# Altium PCB board.PcbDoc (part 1 of 3)
Units mil, origin at the board's own origin, x right, y up, seen from the top; angles counter-clockwise.
Board outline 2246 x 2100 mil, 2 copper layers (Top Layer, Bottom Layer); 47 components, 39 nets, 150 pads, 7 vias.
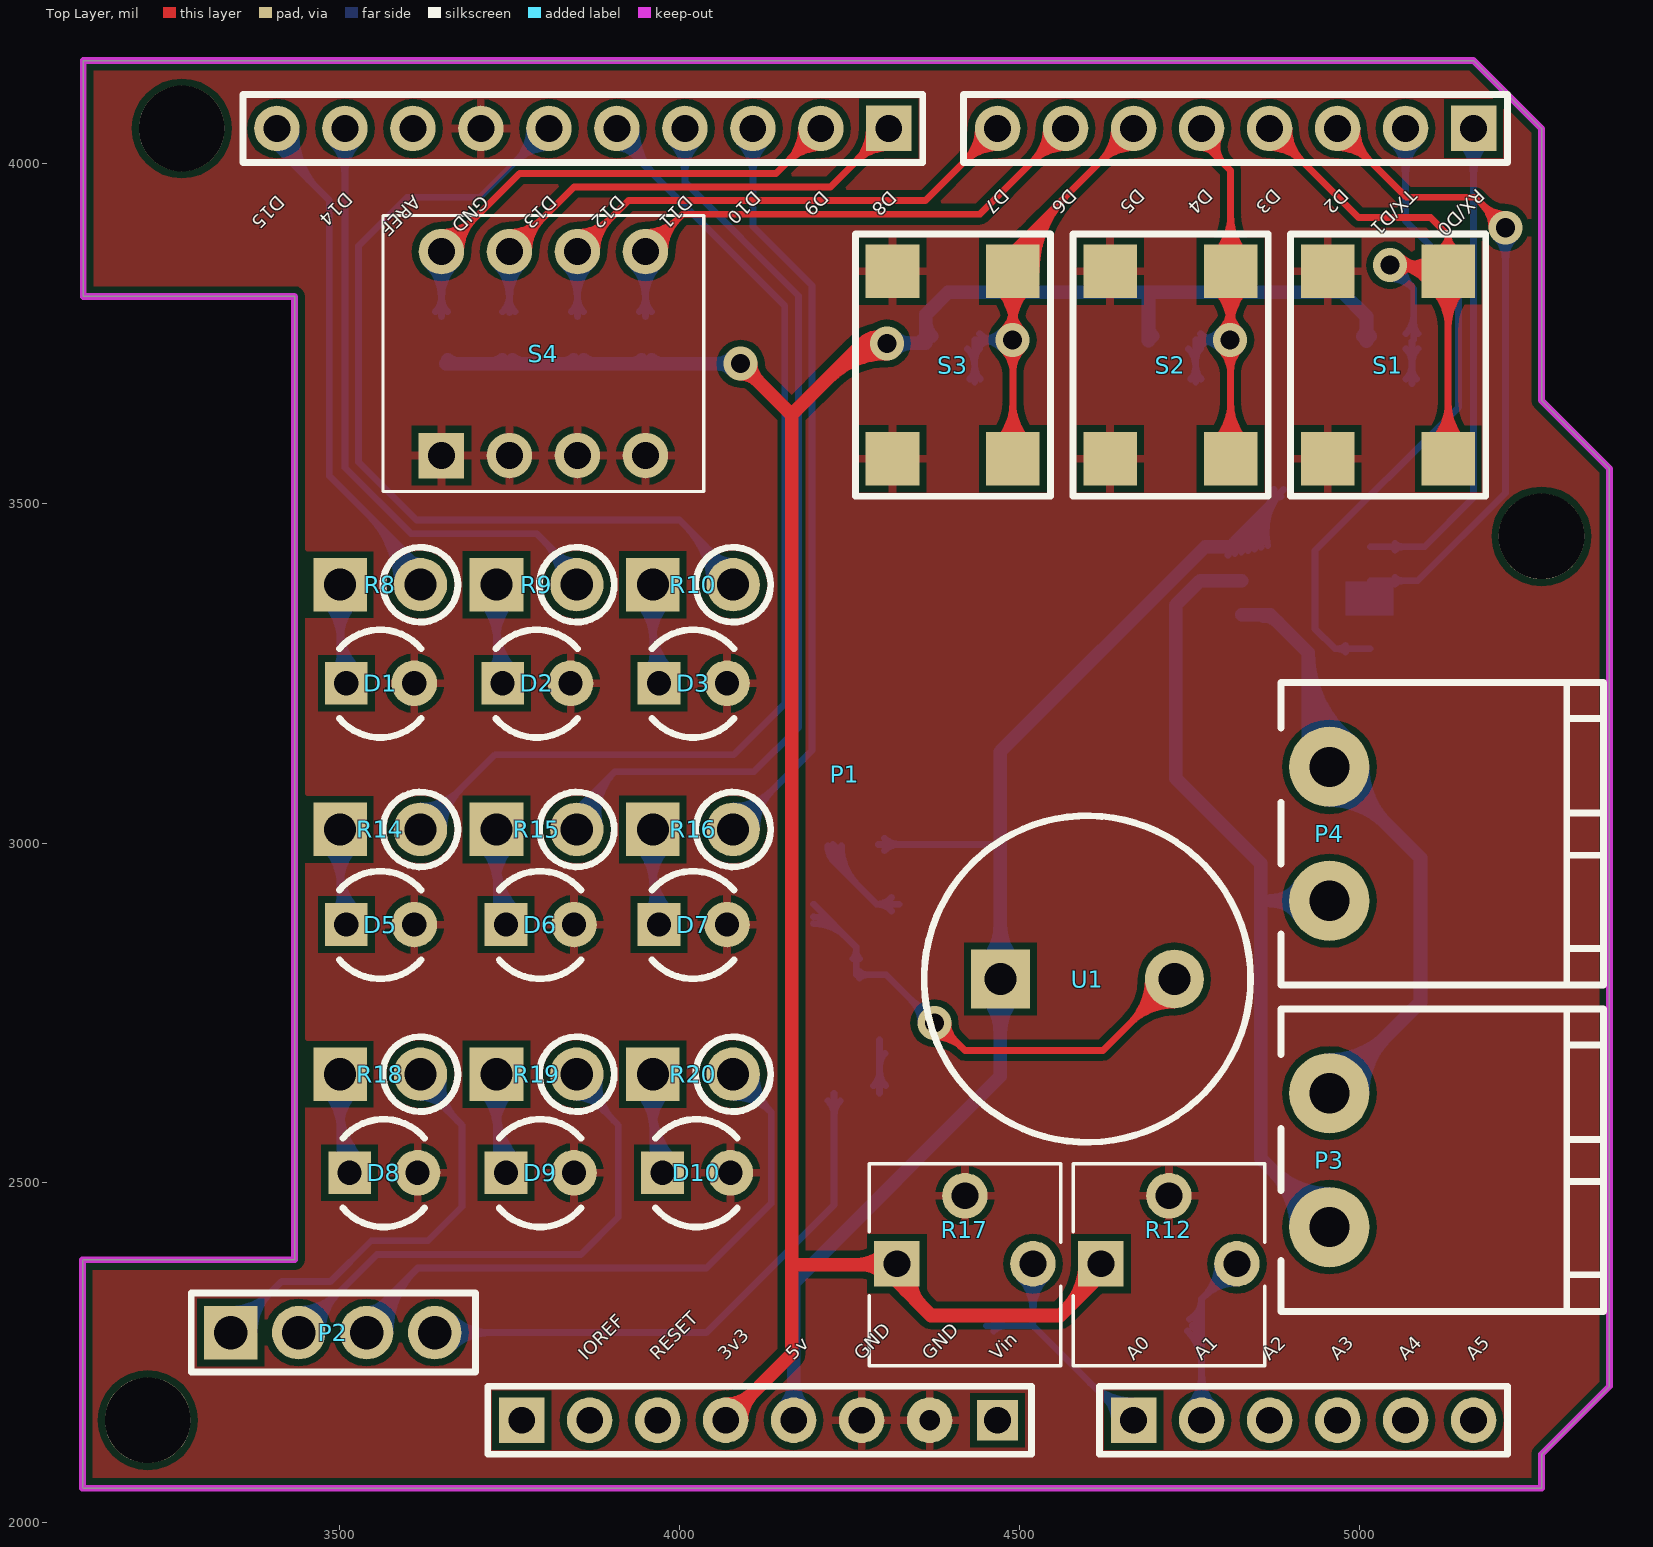
[diagram p0: Top Layer view]
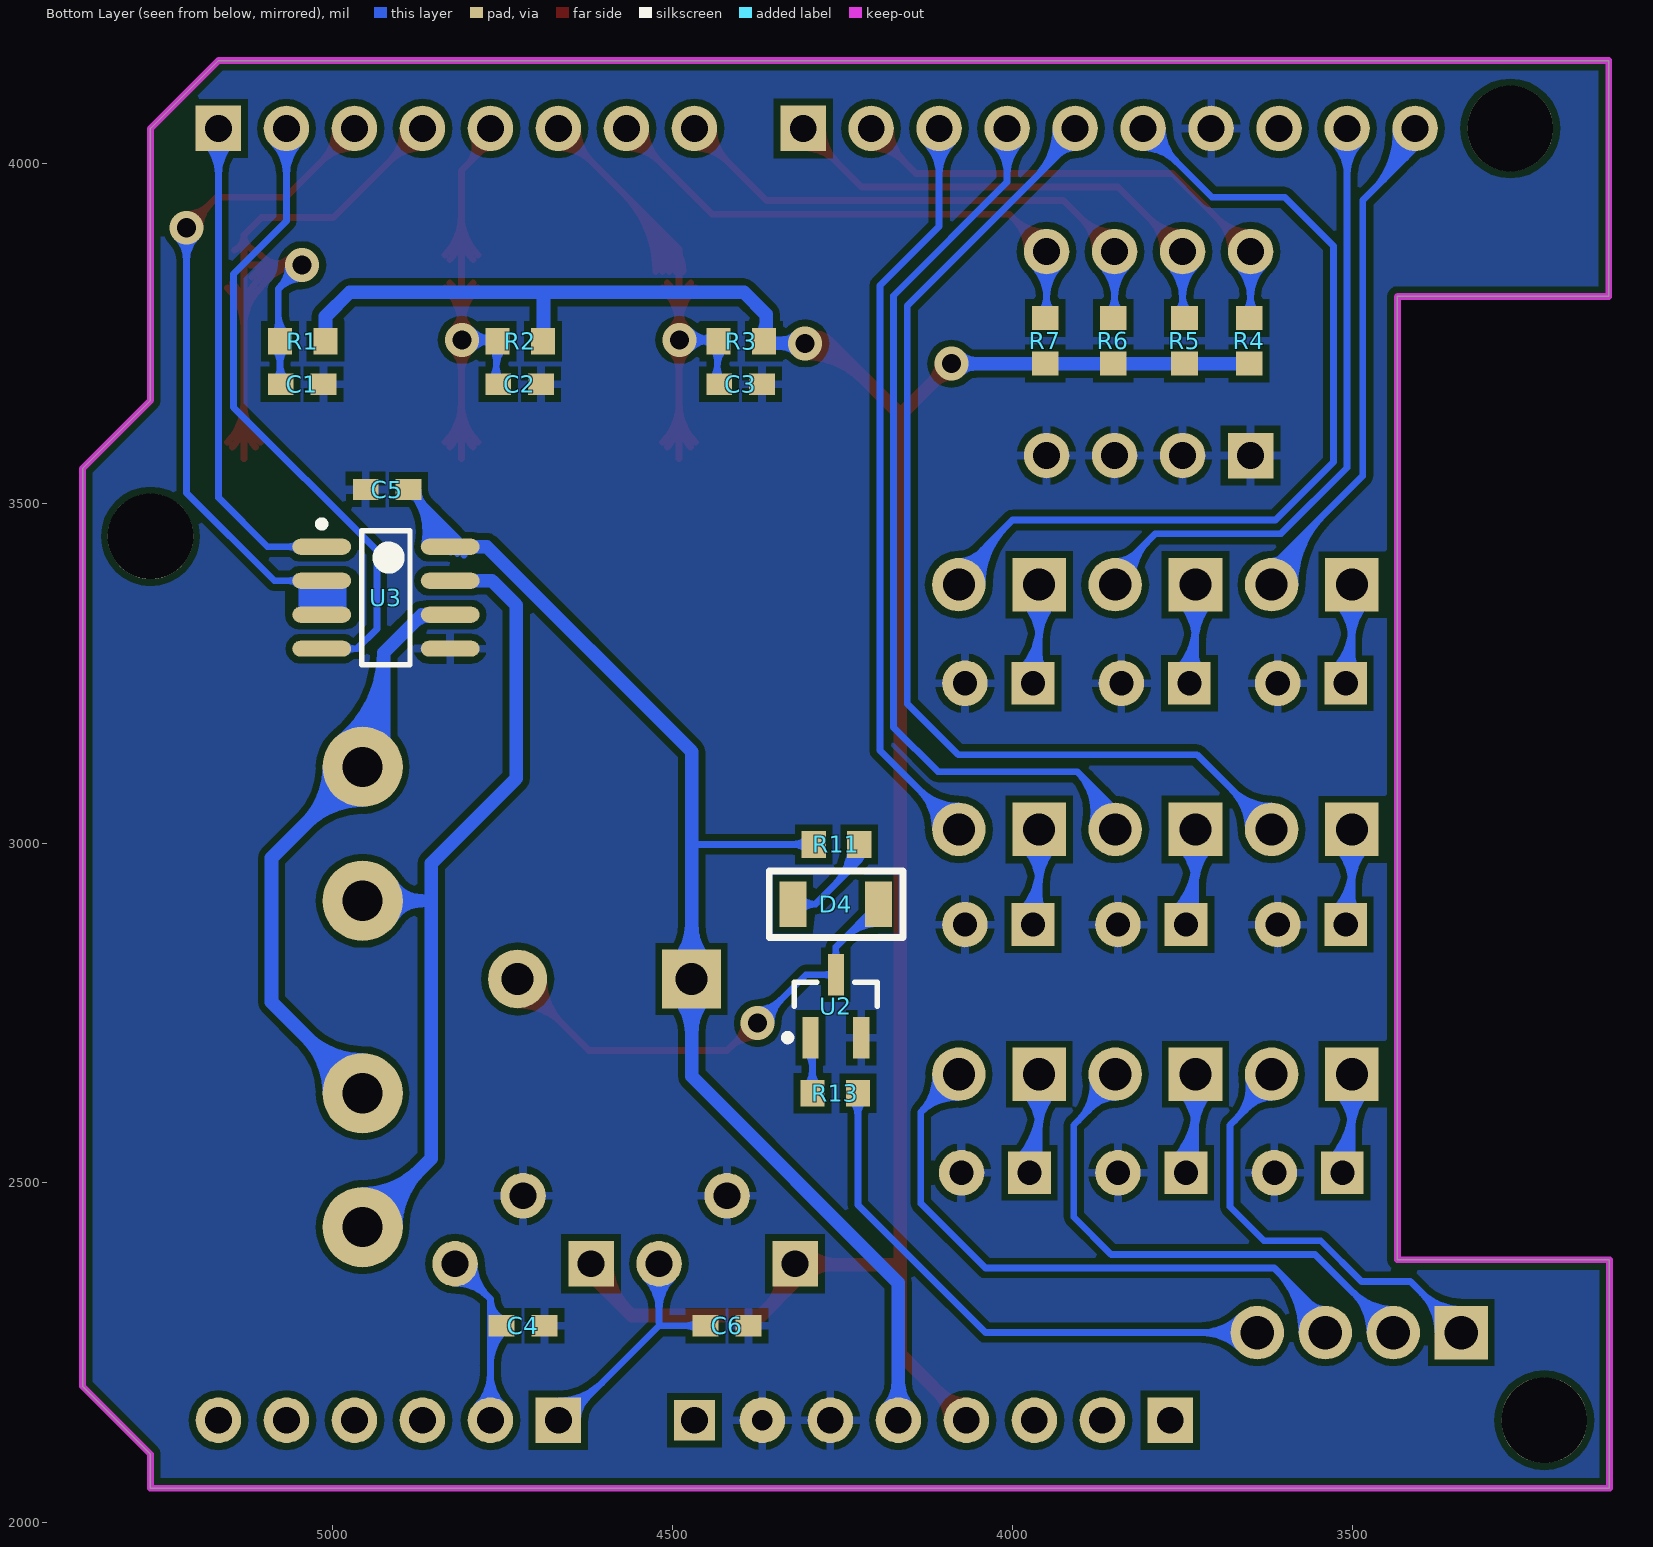
[diagram p1: Bottom Layer view, seen from below]

## Layer stack, top to bottom
Top Layer: signal copper 1.4
Dielectric: dielectric 12.6, FR-4, Dk 4.8
Bottom Layer: signal copper 1.4

## Board outline
3122,2051 3122,2387 3434,2387 3434,3804 3123,3804 3123,4151 5168,4151 5268,4051 5268,3651 5368,3551 5368,2201 5268,2101 5268,2051

## Design rules (kind name [scope] priority, off if disabled: settings)
Clearance Clearance_Board_Keepout [OnLayer('KeepOutLayer')] p1: gap=20
Clearance Screw [InPoly vs HasPad('Free-')] p2: gap=50
Clearance PowerNet [InNetClass('PowerNets')] p3: gap=20
Clearance Fill [IsFill OR InPoly vs IsFill] p4: gap=20
Clearance Polygon [InPoly vs InPoly] p5: gap=10
Clearance Clearance_Via_Pad [(IsVia) vs (IsPad)] p6: gap=15
Clearance Clearance_Via_Via [(IsVia) vs (IsVia)] p7: gap=15
Clearance Clearance_DiffPairRouting [(IsTrack AND InDifferentialPairClass('All Differential Pairs')) vs (IsTrack AND InDifferentialPairClass('All Differential Pairs'))] p8: gap=8
Clearance Minimum_pad_component_clearcance [(InPadClass('All Pads') AND InComponentClass('All Components')) vs (InPadClass('All Pads') AND InComponentClass('All Components'))] p9: gap=7
Clearance Clearance_wara_Default [All] p10: gap=10
DiffPairsRouting [All] p1: maxlimit=10 minlimit=8 mostfreqgap=8 maxuncoupledlength=500
HoleSize [All] p1: absolutevalues=TRUE maxlimit=260 minlimit=20 maxpercent=80.000 minpercent=20.000
MinimumAnnularRing [All] p1: minimumring=8
PolygonConnect [All] p1: connectstyle=Relief reliefconductorwidth=12 reliefentries=4 polygonreliefangle="90 Angle"
RoutingPriority RoutingPriority_Power [InNetClass('Power')] p1: routingpriority=50
RoutingPriority [All] p2: routingpriority=0
RoutingVias [All] p1: holewidth=20 width=36 viastyle="Through Hole" minholewidth=20 minwidth=36 maxholewidth=28 maxwidth=50
SilkscreenOverComponentPads [All] p1: minsilkscreentomaskgap=10
SolderMaskExpansion ViaSolderMaskExpansion [IsVia] p1: expansion=-100
SolderMaskExpansion [All] p2: expansion=5
Width Width_Trackends [All] p1: maxlimit=200 minlimit=5 preferedwidth=7.87 checkconnectedcopper=TRUE
Width Width_Power [InNetClass('Power')] p2: maxlimit=200 minlimit=50 preferedwidth=50
Width Width_All [All] p3: maxlimit=200 minlimit=8 preferedwidth=10
24 further rules are at their usual default settings.

## Components (designator, comment, footprint, x,y, rotation, side; value= is the part's Value field where it differs from the comment)
C1 "0.1uF" CAP0603 5045,3675 r0 bottom
C2 "0.1uF" CAP0603 4725,3675 r0 bottom
C3 "0.1uF" CAP0603 4400,3675 r0 bottom
C4 "1uF" CAP0603 4720,2290 r0 bottom
C5 "0.1uF" CAP0603 4920,3520 r180 bottom
C6 "1uF" CAP0603 4420,2290 r0 bottom
D1 "RED" LED_RED_3MM 3560,3235 r0 top
D2 "YELLOW" LED_YELLOW_3MM 3790,3235 r0 top
D3 "GREEN" LED_GREEN_3MM 4020,3235 r0 top
D4 "PMLL4148L" SOD_08 4260,2910 r0 bottom
D5 "RED" LED_RED_3MM 3560,2880 r0 top
D6 "YELLOW" LED_YELLOW_3MM 3795,2880 r0 top
D7 "GREEN" LED_GREEN_3MM 4020,2880 r0 top
D8 "RED" LED_RED_3MM 3565,2515 r0 top
D9 "YELLOW" LED_YELLOW_3MM 3795,2515 r0 top
D10 "GREEN" LED_GREEN_3MM 4025,2515 r0 top
P1 "NUCLEO F401RE Arduino Shield" NECLEO_F401RE_SHIELD 3740,3320 r0 top locked
P2 "Header 4" PIN_STRAIGHT_1X4 3640,2280 r0 top
P3 "RS485" 5EHDRC_1X2 5100,2540 r90 top
P4 "RS485" 5EHDRC_1X2 5100,3020 r90 top
R1 "10k" RES0603 5045,3740 r0 bottom
R2 "10k" RES0603 4725,3740 r0 bottom
R3 "10k" RES0603 4400,3740 r0 bottom
R4 "10k" RES0603 3650,3740 r90 bottom
R5 "10k" RES0603 3745,3740 r90 bottom
R6 "10k" RES0603 3850,3740 r90 bottom
R7 "10k" RES0603 3950,3740 r90 bottom
R8 "100" RES_VERTICAL_1/4W 3560,3380 r0 top
R9 "100" RES_VERTICAL_1/4W 3790,3380 r0 top
R10 "100" RES_VERTICAL_1/4W 4020,3380 r0 top
R11 "1k" RES0603 4260,3000 r0 bottom
R12 "1K" POTEN_3362P 4720,2380 r0 top
R13 "1k" RES0603 4260,2630 r180 bottom
R14 "100" RES_VERTICAL_1/4W 3560,3020 r0 top
R15 "100" RES_VERTICAL_1/4W 3790,3020 r0 top
R16 "100" RES_VERTICAL_1/4W 4020,3020 r0 top
R17 "1K" POTEN_3362P 4420,2380 r0 top
R18 "100" RES_VERTICAL_1/4W 3560,2660 r0 top
R19 "100" RES_VERTICAL_1/4W 3790,2660 r0 top
R20 "100" RES_VERTICAL_1/4W 4020,2660 r0 top
S1 "TACT_SW" TACT_SW_6X6 5040,3700 r90 top
S2 "TACT_SW" TACT_SW_6X6 4720,3700 r90 top
S3 "TACT_SW" TACT_SW_6X6 4400,3700 r90 top
S4 "SW DIP-4" DIP_SW_4 3800,3720 r0 top
U1 "Buzzer" MAGNETIC_BUZZER 4600,2800 r0 top
U2 "MMBT4401LT1G" SOT-23A 4260,2760 r90 bottom
U3 "SN75176BDR" SOIC8 4920,3380 r180 bottom

## Footprints (in the part's own frame and the unit in brackets; to place one, negate y for a bottom-side part, rotate by r counter-clockwise, add the part's x,y. Pads: shape width x height; smd on the part's side, far side on the other; paste and mask are expansions set on the pad)
5EHDRC_1X2 [mm]
  round 3 hole 1.5: 1(-2.666,3.658) 2(2.337,3.658)
  silkscreen extent -5.82,-6.58 5.49,5.46, body extent -5.64,-6.45 5.31,5.31, height 8.51
CAP0603 [mm]
  rect 0.965x0.8 smd: 1(-0.8,0) 2(0.8,0)
  body extent -0.84,-0.43 0.81,0.43, height 0.55
DIP_SW_4 [mm] "Dip Switch 4 Positions, SPST,Silver Plated Contact,  Through Hole"
  rect 1.7x1.7 hole 1: 1(-3.81,-3.81)
  round 1.7 hole 1: 2(-1.27,-3.81) 3(1.27,-3.81) 4(3.81,-3.81) 5(3.81,3.81) 6(1.27,3.81) 7(-1.27,3.81) 8(-3.81,3.81)
  silkscreen extent -5.99,-5.16 5.99,5.16, body extent -5.84,-5 5.84,5, height 4.5
LED_GREEN_3MM [mm]
  rect 1.6x1.6 hole 0.9: 1(-1.27,0)
  round 1.7 hole 0.9: 2(1.27,0)
  silkscreen extent -1.53,-2.02 1.53,2, body extent -1.87,-1.91 1.97,1.93, height 5.32
LED_RED_3MM [mm]
  rect 1.6x1.6 hole 0.9: 1(-1.27,0)
  round 1.7 hole 0.9: 2(1.27,0)
  silkscreen extent -1.53,-2.02 1.53,2, body extent -1.87,-1.91 1.97,1.93, height 5.32
LED_YELLOW_3MM [mm]
  rect 1.6x1.6 hole 0.9: 1(-1.27,0)
  round 1.7 hole 0.9: 2(1.27,0)
  silkscreen extent -1.53,-2.02 1.53,2, body extent -1.87,-1.91 1.97,1.93, height 5.32
MAGNETIC_BUZZER [mm]
  rect 2.2x2.2 hole 1.2: 1(-3.25,0)
  round 2.2 hole 1.2: 2(3.25,0)
  silkscreen extent -6.1,-6.1 6.1,6.1, body extent -5.99,-6.05 5.96,5.93, height 8.6
NECLEO_F401RE_SHIELD [mm]
  round 3.2 hole 3.2: 0(-13.259,-29.693) 0(-11.989,18.567) 0(38.811,3.327)
  rect 1.7x1.7 hole 1: 1(0.711,-29.693) 9(23.571,-29.693) 15(36.271,18.567) 23(14.427,18.567)
  round 1.7 hole 1: 2(3.251,-29.693) 3(5.791,-29.693) 4(8.331,-29.693) 5(10.871,-29.693) 6(13.411,-29.693) 10(26.111,-29.693) 11(28.651,-29.693) 12(31.191,-29.693) 13(33.731,-29.693) 14(36.271,-29.693) 16(33.731,18.567) 17(31.191,18.567) 18(28.651,18.567) 19(26.111,18.567) 20(23.571,18.567) 21(21.031,18.567) 22(18.491,18.567) 24(11.887,18.567) 25(9.347,18.567) 26(6.807,18.567) 27(4.267,18.567) 28(1.727,18.567) 29(-0.813,18.567) 30(-3.353,18.567) 31(-5.893,18.567) 32(-8.433,18.567)
  round 1.7 hole 0.762: 7(15.951,-29.693)
  rect 1.524x1.524 hole 1: 8(18.491,-29.693)
  silkscreen extent -9.7,-30.96 37.54,19.84, body extent -9.7,-30.96 37.54,19.84, height 8.5
PIN_STRAIGHT_1X4 [mm]
  rect 2x2 hole 1.25: 1(-7.62,0)
  round 2 hole 1.25: 2(-5.08,0) 3(-2.54,0) 4(0,0)
  silkscreen extent -9.09,-1.47 1.52,1.47, body extent -8.89,-1.27 1.27,1.27, height 8.54
POTEN_3362P [mm]
  rect 1.7x1.7 hole 1: 1(-2.54,0.03)
  round 1.7 hole 1: 2(0,2.57) 3(2.54,0.03)
  silkscreen extent -3.58,-3.78 3.58,3.76, body extent -3.3,-3.53 3.3,3.51, height 4.8
RES0603 [mm]
  rect 0.9x1 smd: 1(-0.875,0.051) 2(0.825,0.051)
  body extent -0.83,-0.35 0.77,0.45, height 0.45
RES_VERTICAL_1/4W [mm]
  rect 2x2 hole 1.2: 1(-1.5,0)
  round 2 hole 1.2: 2(1.5,0)
  silkscreen extent 0.1,-1.4 2.9,1.4, body extent -1.78,-1.24 2.76,1.29, height 7.3
SOD_08 [mm]
  rect 1x1.7 smd: 1(-1.6,0) 2(1.6,0)
  silkscreen extent -2.51,-1.24 2.49,1.24, body extent -1.85,-0.79 1.8,0.81, height 1.6
SOIC8 [mm]
  oval 2.2x0.6 smd: 1(-2.443,1.418) 2(-2.443,0.148) 3(-2.443,-1.122) 4(-2.443,-2.392) 5(2.357,-2.392) 6(2.357,-1.122) 7(2.357,0.148) 8(2.357,1.418)
  silkscreen extent -2.57,-2.99 0.86,2.39, body extent -2.04,-2.99 1.96,2.01, height 1.75
SOT-23A [mm] "SOT23, 3-Leads, Body 3.1x3.1mm (max), Pitch 0.95mm, IPC Medium Density"
  rect 1.55x0.6 smd: 1(-1.175,0.95) 2(-1.175,-0.95) 3(1.175,0)
  silkscreen extent -1.3,-1.55 0.9,1.93, body extent -0.9,-1.55 0.9,1.55, height 1.45
TACT_SW_6X6 [mm]
  rect 2x2 smd: 1(-3.424,2.199) 2(3.576,2.2) 3(-3.424,-2.301) 4(3.576,-2.301)
  silkscreen extent -4.83,-3.71 4.98,3.58, body extent -3.99,-3.05 4.17,2.95, height 5

## Part data
C1 C2 C3 C5: library part Cap, "Capacitor"
C4 C6: library part Cap, "Chip Monolithic Ceramic Cap 1uF/50Vdc, ±10%, X5R"
D1 D5 D8: library part LED3, "Typical BLUE LED Round 3mm"
D2 D3 D6 D7 D9 D10: library part LED3, "Typical GREEN LED Round 3mm"
D4: library part Diode, "HIGH-SPEED SWITCHING DIODES 75V/200MA"
P1: library part NUCLEO_F401RE_ARDUINO_SHEILD, "NUCLEO F401RE Arduino UNO shield"
P2: "Pin Header Connector 4 Pins,2.54mm Pitch"
P3 P4: library part "Header 2", "Header, 2-Pin"
R1 R2 R3 R4 R5 R6 R7 R8 R9 R10 R14 R15 R16 R18 R19 R20: library part Res1, "Thick Film Chip Resistors 10KO ±1%,1/10W"
R11 R13: library part Res1, "Thick Film Chip Resistors 1KO ±1%,1/10W"
R12 R17: library part "Res Tap", "Trimpot 1 Turns, 1kO,±10%, 0.5 w."
S1 S2 S3: "Tact Switch 6x6mm, 4 Pins SMD"
S4: "DIP Switch, 4 Position, SPST"
U2: library part NPN, "Switching Transistor NPN 40V/0.6A"
U3: library part MAX485CSA, "Low-Power, Slew-Rate-Limited RS-485/RS-422 Transceiver"

## Via types
v1: diameter 50, hole 28, Top Layer to Bottom Layer, 7 vias

## Nets (pads, with @x,y where several pads share a name; then routed paths per layer and width w, separated by ;. In a path a pad name is that pad's centre, name@x,y a point inside that pad or via, vN(x,y) a via of type N, cw(c..) or ccw(c..) an arc to the next point about the centre after c; other vN are vias at no path point)
3V3: P1.4 R1.1 R2.1 R3.1 R4.1 R5.1 R6.1 R7.1 R12.1 R17.1 | length 8949.3
  Top Layer w20: P1.4@4068,2151 4165,2248 4165,2380 ; v1(4090,3705) 4165,3630 ; v1(4305,3735) 4270,3735 ; R12.1@4620,2381.18 4620,2365 4560,2305 4370,2305 4318.82,2356.18 4318.82,2380 4165,2380 ; P1.4@4068,2174.46 ccw(c4068,2231.11) 4108.06,2191.06 ; P1.4@4068,2174.46 ccw(c4068,2231.11) 4108.06,2191.06 ; P1.4@4068,2174.46 ccw(c4068,2231.11) 4108.06,2191.06 ; P1.4@4068,2174.46 ccw(c4068,2231.11) 4108.06,2191.06 ; P1.4@4068,2174.46 ccw(c4068,2231.11) 4108.06,2191.06 ; v1@4090,3690 cw(c4090,3653.79) 4115.61,3679.39 ; v1@4090,3690 cw(c4090,3653.79) 4115.61,3679.39 ; v1@4090,3690 cw(c4090,3653.79) 4115.61,3679.39 ; v1@4090,3690 cw(c4090,3653.79) 4115.61,3679.39 ; v1@4090,3690 cw(c4090,3653.79) 4115.61,3679.39 ; P1.4@4091.46,2151 cw(c4148.11,2151) 4108.06,2191.06 ; P1.4@4091.46,2151 cw(c4148.11,2151) 4108.06,2191.06 ; P1.4@4091.46,2151 cw(c4148.11,2151) 4108.06,2191.06 ; P1.4@4091.46,2151 cw(c4148.11,2151) 4108.06,2191.06 ; P1.4@4091.46,2151 cw(c4148.11,2151) 4108.06,2191.06 ; v1@4105,3705 ccw(c4141.21,3705) 4115.61,3679.39 ; v1@4105,3705 ccw(c4141.21,3705) 4115.61,3679.39 ; v1@4105,3705 ccw(c4141.21,3705) 4115.61,3679.39 ; v1@4105,3705 ccw(c4141.21,3705) 4115.61,3679.39 ; v1@4105,3705 ccw(c4141.21,3705) 4115.61,3679.39 ; 4165,2380 4165,3630 ; 4165,3630 4270,3735 ; 4219.64,3684.64 cw(c4305,3599.29) v1@4305,3720 ; 4219.64,3684.64 cw(c4305,3599.29) v1@4305,3720 ; 4219.64,3684.64 cw(c4305,3599.29) v1@4305,3720 ; 4219.64,3684.64 cw(c4305,3599.29) v1@4305,3720 ; 4219.64,3684.64 cw(c4305,3599.29) v1@4305,3720 ; 4252.5,3717.5 cw(c4277.74,3692.26) v1@4296.93,3722.35 ; 4252.5,3717.5 cw(c4277.74,3692.26) v1@4296.93,3722.35 ; 4252.5,3717.5 cw(c4277.74,3692.26) v1@4296.93,3722.35 ; 4252.5,3717.5 cw(c4277.74,3692.26) v1@4296.93,3722.35 ; 4252.5,3717.5 cw(c4277.74,3692.26) v1@4296.93,3722.35 ; 4253.79,3718.79 cw(c4305,3667.57) v1@4305,3740 ; 4253.79,3718.79 cw(c4305,3667.57) v1@4305,3740 ; 4253.79,3718.79 cw(c4305,3667.57) v1@4305,3740 ; 4253.79,3718.79 cw(c4305,3667.57) v1@4305,3740 ; 4253.79,3718.79 cw(c4305,3667.57) v1@4305,3740 ; 4260.5,2380 ccw(c4260.5,2440.68) R17.1@4303.41,2397.77 ; 4260.5,2380 ccw(c4260.5,2440.68) R17.1@4303.41,2397.77 ; 4260.5,2380 ccw(c4260.5,2440.68) R17.1@4303.41,2397.77 ; 4260.5,2380 ccw(c4260.5,2440.68) R17.1@4303.41,2397.77 ; 4260.5,2380 ccw(c4260.5,2440.68) R17.1@4303.41,2397.77 ; 4266.2,2380 cw(c4266.2,2327.38) R17.1@4303.41,2364.59 ; 4266.2,2380 cw(c4266.2,2327.38) R17.1@4303.41,2364.59 ; 4266.2,2380 cw(c4266.2,2327.38) R17.1@4303.41,2364.59 ; 4266.2,2380 cw(c4266.2,2327.38) R17.1@4303.41,2364.59 ; 4266.2,2380 cw(c4266.2,2327.38) R17.1@4303.41,2364.59 ; 4270,3735 cw(c4270,3701.67) v1@4294.14,3724.66 ; 4270,3735 ccw(c4270,3768.33) v1@4294.14,3745.34 ; 4270,3735 cw(c4270,3701.67) v1@4294.14,3724.66 ; 4270,3735 ccw(c4270,3768.33) v1@4294.14,3745.34 ; 4270,3735 ccw(c4270,3768.33) v1@4294.14,3745.34 ; 4270,3735 cw(c4270,3701.67) v1@4294.14,3724.66 ; 4270,3735 ccw(c4270,3768.33) v1@4294.14,3745.34 ; 4270,3735 cw(c4270,3701.67) v1@4294.14,3724.66 ; 4270,3735 ccw(c4270,3768.33) v1@4294.14,3745.34 ; 4270,3735 cw(c4270,3701.67) v1@4294.14,3724.66 ; 4270.11,3735.11 cw(c4291.46,3713.77) v1@4307.69,3739.22 ; 4270.11,3735.11 cw(c4291.46,3713.77) v1@4307.69,3739.22 ; 4270.11,3735.11 cw(c4291.46,3713.77) v1@4307.69,3739.22 ; 4270.11,3735.11 cw(c4291.46,3713.77) v1@4307.69,3739.22 ; 4270.11,3735.11 cw(c4291.46,3713.77) v1@4307.69,3739.22 ; R17.1@4323.32,2380.2 ccw(c4360.45,2369.28) 4333.09,2341.91 ; R17.1@4323.32,2380.2 ccw(c4360.45,2369.28) 4333.09,2341.91 ; R17.1@4323.32,2380.2 ccw(c4360.45,2369.28) 4333.09,2341.91 ; R17.1@4323.32,2380.2 ccw(c4360.45,2369.28) 4333.09,2341.91 ; R17.1@4323.32,2380.2 ccw(c4360.45,2369.28) 4333.09,2341.91 ; R17.1@4342.51,2374.56 ccw(c4397.27,2358.45) 4356.91,2318.09 ; R17.1@4342.51,2374.56 ccw(c4397.27,2358.45) 4356.91,2318.09 ; R17.1@4342.51,2374.56 ccw(c4397.27,2358.45) 4356.91,2318.09 ; R17.1@4342.51,2374.56 ccw(c4397.27,2358.45) 4356.91,2318.09 ; R17.1@4342.51,2374.56 ccw(c4397.27,2358.45) 4356.91,2318.09 ; 4568.5,2313.5 ccw(c4500.82,2381.18) R12.1@4596.54,2381.18 ; 4568.5,2313.5 ccw(c4500.82,2381.18) R12.1@4596.54,2381.18 ; 4568.5,2313.5 ccw(c4500.82,2381.18) R12.1@4596.54,2381.18 ; 4568.5,2313.5 ccw(c4500.82,2381.18) R12.1@4596.54,2381.18 ; 4568.5,2313.5 ccw(c4500.82,2381.18) R12.1@4596.54,2381.18 ; 4602.64,2347.64 ccw(c4569.11,2381.18) R12.1@4616.54,2381.18 ; 4602.64,2347.64 ccw(c4569.11,2381.18) R12.1@4616.54,2381.18 ; 4602.64,2347.64 ccw(c4569.11,2381.18) R12.1@4616.54,2381.18 ; 4602.64,2347.64 ccw(c4569.11,2381.18) R12.1@4616.54,2381.18 ; 4602.64,2347.64 ccw(c4569.11,2381.18) R12.1@4616.54,2381.18
  Bottom Layer w20: R4.1@3656.46,3705 3852,3705 v1(4090,3705) ; v1(4305,3735) 4362.54,3735 4362.54,3777.54 4395,3810 4690,3810 ; R2.1@4690,3738.54 4690,3810 ; R1.1@5010.54,3738 5010.54,3774.46 4975,3810 4690,3810 ; R4.1@3659.42,3710.99 ccw(c3673.89,3725.46) 3673.89,3705 ; R4.1@3659.42,3710.99 ccw(c3673.89,3725.46) 3673.89,3705 ; R4.1@3659.42,3710.99 ccw(c3673.89,3725.46) 3673.89,3705 ; R4.1@3659.42,3710.99 ccw(c3673.89,3725.46) 3673.89,3705 ; R4.1@3659.42,3710.99 ccw(c3673.89,3725.46) 3673.89,3705 ; 3725.11,3705 ccw(c3725.11,3725.46) R5.1@3739.58,3710.99 ; 3725.11,3705 ccw(c3725.11,3725.46) R5.1@3739.58,3710.99 ; 3725.11,3705 ccw(c3725.11,3725.46) R5.1@3739.58,3710.99 ; 3725.11,3705 ccw(c3725.11,3725.46) R5.1@3739.58,3710.99 ; 3725.11,3705 ccw(c3725.11,3725.46) R5.1@3739.58,3710.99 ; R5.1@3754.42,3710.99 ccw(c3768.89,3725.46) 3768.89,3705 ; R5.1@3754.42,3710.99 ccw(c3768.89,3725.46) 3768.89,3705 ; R5.1@3754.42,3710.99 ccw(c3768.89,3725.46) 3768.89,3705 ; R5.1@3754.42,3710.99 ccw(c3768.89,3725.46) 3768.89,3705 ; R5.1@3754.42,3710.99 ccw(c3768.89,3725.46) 3768.89,3705 ; 3830.11,3705 ccw(c3830.11,3725.46) R6.1@3844.58,3710.99 ; 3830.11,3705 ccw(c3830.11,3725.46) R6.1@3844.58,3710.99 ; 3830.11,3705 ccw(c3830.11,3725.46) R6.1@3844.58,3710.99 ; 3830.11,3705 ccw(c3830.11,3725.46) R6.1@3844.58,3710.99 ; 3830.11,3705 ccw(c3830.11,3725.46) R6.1@3844.58,3710.99 ; R6.1@3859.42,3710.99 ccw(c3873.89,3725.46) 3873.89,3705 ; R6.1@3859.42,3710.99 ccw(c3873.89,3725.46) 3873.89,3705 ; R6.1@3859.42,3710.99 ccw(c3873.89,3725.46) 3873.89,3705 ; R6.1@3859.42,3710.99 ccw(c3873.89,3725.46) 3873.89,3705 ; R6.1@3859.42,3710.99 ccw(c3873.89,3725.46) 3873.89,3705 ; 3930.11,3705 ccw(c3930.11,3725.46) R7.1@3944.58,3710.99 ; 3930.11,3705 ccw(c3930.11,3725.46) R7.1@3944.58,3710.99 ; 3930.11,3705 ccw(c3930.11,3725.46) R7.1@3944.58,3710.99 ; 3930.11,3705 ccw(c3930.11,3725.46) R7.1@3944.58,3710.99 ; 3930.11,3705 ccw(c3930.11,3725.46) R7.1@3944.58,3710.99 ; R7.1@3959.42,3710.99 ccw(c3973.89,3725.46) 3973.89,3705 ; R7.1@3959.42,3710.99 ccw(c3973.89,3725.46) 3973.89,3705 ; R7.1@3959.42,3710.99 ccw(c3973.89,3725.46) 3973.89,3705 ; R7.1@3959.42,3710.99 ccw(c3973.89,3725.46) 3973.89,3705 ; R7.1@3959.42,3710.99 ccw(c3973.89,3725.46) 3973.89,3705 ; 4053.79,3705 cw(c4053.79,3668.79) v1@4079.39,3694.39 ; 4053.79,3705 ccw(c4053.79,3741.21) v1@4079.39,3715.61 ; 4053.79,3705 cw(c4053.79,3668.79) v1@4079.39,3694.39 ; 4053.79,3705 ccw(c4053.79,3741.21) v1@4079.39,3715.61 ; 4053.79,3705 ccw(c4053.79,3741.21) v1@4079.39,3715.61 ; 4053.79,3705 cw(c4053.79,3668.79) v1@4079.39,3694.39 ; 4053.79,3705 ccw(c4053.79,3741.21) v1@4079.39,3715.61 ; 4053.79,3705 cw(c4053.79,3668.79) v1@4079.39,3694.39 ; 4053.79,3705 ccw(c4053.79,3741.21) v1@4079.39,3715.61 ; 4053.79,3705 cw(c4053.79,3668.79) v1@4079.39,3694.39 ; v1@4315.61,3724.39 cw(c4341.21,3698.79) 4341.21,3735 ; v1@4315.61,3724.39 cw(c4341.21,3698.79) 4341.21,3735 ; v1@4315.61,3724.39 cw(c4341.21,3698.79) 4341.21,3735 ; v1@4315.61,3724.39 cw(c4341.21,3698.79) 4341.21,3735 ; v1@4315.61,3724.39 cw(c4341.21,3698.79) 4341.21,3735 ; v1@4315.61,3745.61 ccw(c4341.21,3771.21) 4341.21,3735 ; v1@4315.61,3745.61 ccw(c4341.21,3771.21) 4341.21,3735 ; v1@4315.61,3745.61 ccw(c4341.21,3771.21) 4341.21,3735 ; v1@4315.61,3745.61 ccw(c4341.21,3771.21) 4341.21,3735 ; v1@4315.61,3745.61 ccw(c4341.21,3771.21) 4341.21,3735 ; 4344.42,3735 ccw(c4344.42,3757.15) R3.1@4360.08,3741.49 ; 4344.42,3735 ccw(c4344.42,3757.15) R3.1@4360.08,3741.49 ; 4344.42,3735 ccw(c4344.42,3757.15) R3.1@4360.08,3741.49 ; 4344.42,3735 ccw(c4344.42,3757.15) R3.1@4360.08,3741.49 ; 4344.42,3735 ccw(c4344.42,3757.15) R3.1@4360.08,3741.49 ; 4362.54,3765.84 ccw(c4391.41,3765.84) R3.1@4370.99,3745.42 ; 4362.54,3765.84 ccw(c4391.41,3765.84) R3.1@4370.99,3745.42 ; 4362.54,3765.84 ccw(c4391.41,3765.84) R3.1@4370.99,3745.42 ; 4362.54,3765.84 ccw(c4391.41,3765.84) R3.1@4370.99,3745.42 ; 4362.54,3765.84 ccw(c4391.41,3765.84) R3.1@4370.99,3745.42 ; 4690,3759.89 ccw(c4710.46,3759.89) R2.1@4695.99,3745.42 ; 4690,3759.89 ccw(c4710.46,3759.89) R2.1@4695.99,3745.42 ; 4690,3759.89 ccw(c4710.46,3759.89) R2.1@4695.99,3745.42 ; 4690,3759.89 ccw(c4710.46,3759.89) R2.1@4695.99,3745.42 ; 4690,3759.89 ccw(c4710.46,3759.89) R2.1@4695.99,3745.42 ; R1.1@5005.08,3745.42 ccw(c4991.91,3758.6) 5010.54,3758.6 ; R1.1@5005.08,3745.42 ccw(c4991.91,3758.6) 5010.54,3758.6 ; R1.1@5005.08,3745.42 ccw(c4991.91,3758.6) 5010.54,3758.6 ; R1.1@5005.08,3745.42 ccw(c4991.91,3758.6) 5010.54,3758.6 ; R1.1@5005.08,3745.42 ccw(c4991.91,3758.6) 5010.54,3758.6 ; 5010.54,3758.6 ccw(c5029.17,3758.6) R1.1@5015.99,3745.42 ; 5010.54,3758.6 ccw(c5029.17,3758.6) R1.1@5015.99,3745.42 ; 5010.54,3758.6 ccw(c5029.17,3758.6) R1.1@5015.99,3745.42 ; 5010.54,3758.6 ccw(c5029.17,3758.6) R1.1@5015.99,3745.42 ; 5010.54,3758.6 ccw(c5029.17,3758.6) R1.1@5015.99,3745.42
5V: C5.2 P1.5 R11.2 U1.1 U3.8 | length 5942.1
  Bottom Layer w10: R11.2@4292.46,2998 4465.05,2998 ; U3.8@4815,3446.5 C5.2@4888.5,3520 ; R11.2@4301.46,2989.01 cw(c4323.16,2967.3) 4323.16,2998 ; R11.2@4301.46,2989.01 cw(c4323.16,2967.3) 4323.16,2998 ; R11.2@4301.46,2989.01 cw(c4323.16,2967.3) 4323.16,2998 ; R11.2@4301.46,2989.01 cw(c4323.16,2967.3) 4323.16,2998 ; R11.2@4301.46,3006.99 ccw(c4323.16,3028.7) 4323.16,2998 ; R11.2@4301.46,3006.99 ccw(c4323.16,3028.7) 4323.16,2998 ; R11.2@4301.46,3006.99 ccw(c4323.16,3028.7) 4323.16,2998 ; R11.2@4301.46,3006.99 ccw(c4323.16,3028.7) 4323.16,2998 ; 4807.03,3423.26 cw(c4828.89,3428.57) U3.8@4812.98,3444.48 ; 4807.03,3423.26 cw(c4828.89,3428.57) U3.8@4812.98,3444.48 ; 4807.03,3423.26 cw(c4828.89,3428.57) U3.8@4812.98,3444.48 ; 4807.03,3423.26 cw(c4828.89,3428.57) U3.8@4812.98,3444.48 ; 4807.03,3423.26 cw(c4828.89,3428.57) U3.8@4812.98,3444.48 ; U3.8@4816.75,3425.62 cw(c4849.14,3433.49) 4825.57,3457.06 ; U3.8@4816.75,3425.62 cw(c4849.14,3433.49) 4825.57,3457.06 ; U3.8@4816.75,3425.62 cw(c4849.14,3433.49) 4825.57,3457.06 ; U3.8@4816.75,3425.62 cw(c4849.14,3433.49) 4825.57,3457.06 ; U3.8@4816.75,3425.62 cw(c4849.14,3433.49) 4825.57,3457.06 ; U3.8@4826.46,3427.98 cw(c4869.4,3438.41) 4838.16,3469.65 ; U3.8@4826.46,3427.98 cw(c4869.4,3438.41) 4838.16,3469.65 ; U3.8@4826.46,3427.98 cw(c4869.4,3438.41) 4838.16,3469.65 ; U3.8@4826.46,3427.98 cw(c4869.4,3438.41) 4838.16,3469.65 ; U3.8@4826.46,3427.98 cw(c4869.4,3438.41) 4838.16,3469.65 ; U3.8@4836.18,3430.34 cw(c4889.65,3443.33) 4850.74,3482.24 ; U3.8@4836.18,3430.34 cw(c4889.65,3443.33) 4850.74,3482.24 ; U3.8@4836.18,3430.34 cw(c4889.65,3443.33) 4850.74,3482.24 ; U3.8@4836.18,3430.34 cw(c4889.65,3443.33) 4850.74,3482.24 ; U3.8@4836.18,3430.34 cw(c4889.65,3443.33) 4850.74,3482.24 ; U3.8@4845.9,3432.7 cw(c4909.9,3448.25) 4863.33,3494.82 ; U3.8@4845.9,3432.7 cw(c4909.9,3448.25) 4863.33,3494.82 ; U3.8@4845.9,3432.7 cw(c4909.9,3448.25) 4863.33,3494.82 ; U3.8@4845.9,3432.7 cw(c4909.9,3448.25) 4863.33,3494.82 ; U3.8@4845.9,3432.7 cw(c4909.9,3448.25) 4863.33,3494.82 ; U3.8@4855.62,3435.06 cw(c4930.16,3453.17) C5.2@4875.92,3507.41 ; U3.8@4855.62,3435.06 cw(c4930.16,3453.17) C5.2@4875.92,3507.41 ; U3.8@4855.62,3435.06 cw(c4930.16,3453.17) C5.2@4875.92,3507.41 ; U3.8@4855.62,3435.06 cw(c4930.16,3453.17) C5.2@4875.92,3507.41 ; U3.8@4855.62,3435.06 cw(c4930.16,3453.17) C5.2@4875.92,3507.41 ; 4864.61,3496.11 ccw(c4840.72,3520) C5.2@4874.51,3520 ; 4864.61,3496.11 ccw(c4840.72,3520) C5.2@4874.51,3520 ; 4864.61,3496.11 ccw(c4840.72,3520) C5.2@4874.51,3520 ; 4864.61,3496.11 ccw(c4840.72,3520) C5.2@4874.51,3520 ; 4864.61,3496.11 ccw(c4840.72,3520) C5.2@4874.51,3520 ; U3.8@4865.33,3437.42 cw(c4950.41,3458.09) C5.2@4888.5,3520 ; U3.8@4865.33,3437.42 cw(c4950.41,3458.09) C5.2@4888.5,3520 ; U3.8@4865.33,3437.42 cw(c4950.41,3458.09) C5.2@4888.5,3520 ; U3.8@4865.33,3437.42 cw(c4950.41,3458.09) C5.2@4888.5,3520 ; U3.8@4865.33,3437.42 cw(c4950.41,3458.09) C5.2@4888.5,3520 ; 4872.45,3503.95 cw(c4885.26,3491.15) C5.2@4885.26,3509.25 ; 4872.45,3503.95 cw(c4885.26,3491.15) C5.2@4885.26,3509.25 ; 4872.45,3503.95 cw(c4885.26,3491.15) C5.2@4885.26,3509.25 ; 4872.45,3503.95 cw(c4885.26,3491.15) C5.2@4885.26,3509.25 ; 4872.45,3503.95 cw(c4885.26,3491.15) C5.2@4885.26,3509.25
  Bottom Layer w20: P1.5@4168,2151 4168,2353 4472.05,2657.05 U1.1@4472.05,2800 4472.05,3134.47 4773.39,3435.81 U3.8@4827.22,3435.81 ; P1.5@4151.41,2167.59 ccw(c4111.35,2207.65) 4168,2207.65 ; P1.5@4151.41,2167.59 ccw(c4111.35,2207.65) 4168,2207.65 ; P1.5@4151.41,2167.59 ccw(c4111.35,2207.65) 4168,2207.65 ; P1.5@4151.41,2167.59 ccw(c4111.35,2207.65) 4168,2207.65 ; P1.5@4151.41,2167.59 ccw(c4111.35,2207.65) 4168,2207.65 ; 4168,2207.65 ccw(c4224.65,2207.65) P1.5@4184.59,2167.59 ; 4168,2207.65 ccw(c4224.65,2207.65) P1.5@4184.59,2167.59 ; 4168,2207.65 ccw(c4224.65,2207.65) P1.5@4184.59,2167.59 ; 4168,2207.65 ccw(c4224.65,2207.65) P1.5@4184.59,2167.59 ; 4168,2207.65 ccw(c4224.65,2207.65) P1.5@4184.59,2167.59 ; U1.1@4448.5,2776.45 cw(c4391.64,2719.59) 4472.05,2719.59 ; U1.1@4448.5,2776.45 cw(c4391.64,2719.59) 4472.05,2719.59 ; U1.1@4448.5,2776.45 cw(c4391.64,2719.59) 4472.05,2719.59 ; U1.1@4448.5,2776.45 cw(c4391.64,2719.59) 4472.05,2719.59 ; U1.1@4448.5,2776.45 cw(c4391.64,2719.59) 4472.05,2719.59 ; U1.1@4448.5,2823.55 ccw(c4391.64,2880.41) 4472.05,2880.41 ; U1.1@4448.5,2823.55 ccw(c4391.64,2880.41) 4472.05,2880.41 ; U1.1@4448.5,2823.55 ccw(c4391.64,2880.41) 4472.05,2880.41 ; U1.1@4448.5,2823.55 ccw(c4391.64,2880.41) 4472.05,2880.41 ; U1.1@4448.5,2823.55 ccw(c4391.64,2880.41) 4472.05,2880.41 ; 4472.05,2719.59 cw(c4552.46,2719.59) U1.1@4495.6,2776.45 ; 4472.05,2719.59 cw(c4552.46,2719.59) U1.1@4495.6,2776.45 ; 4472.05,2719.59 cw(c4552.46,2719.59) U1.1@4495.6,2776.45 ; 4472.05,2719.59 cw(c4552.46,2719.59) U1.1@4495.6,2776.45 ; 4472.05,2719.59 cw(c4552.46,2719.59) U1.1@4495.6,2776.45 ; 4472.05,2880.41 ccw(c4552.46,2880.41) U1.1@4495.6,2823.55 ; 4472.05,2880.41 ccw(c4552.46,2880.41) U1.1@4495.6,2823.55 ; 4472.05,2880.41 ccw(c4552.46,2880.41) U1.1@4495.6,2823.55 ; 4472.05,2880.41 ccw(c4552.46,2880.41) U1.1@4495.6,2823.55 ; 4472.05,2880.41 ccw(c4552.46,2880.41) U1.1@4495.6,2823.55
BUZZ_SIGNAL: P2.4 R13.2 | length 2184.6
  Bottom Layer w10: P2.4@3640,2280 4040,2280 4227.54,2467.54 R13.2@4227.54,2632 ; P2.4@3657.23,2262.77 cw(c3698.83,2221.17) 3698.83,2280 ; P2.4@3657.23,2262.77 cw(c3698.83,2221.17) 3698.83,2280 ; P2.4@3657.23,2262.77 cw(c3698.83,2221.17) 3698.83,2280 ; P2.4@3657.23,2262.77 cw(c3698.83,2221.17) 3698.83,2280 ; P2.4@3657.23,2262.77 cw(c3698.83,2221.17) 3698.83,2280 ; P2.4@3657.23,2297.23 ccw(c3698.83,2338.83) 3698.83,2280 ; P2.4@3657.23,2297.23 ccw(c3698.83,2338.83) 3698.83,2280 ; P2.4@3657.23,2297.23 ccw(c3698.83,2338.83) 3698.83,2280 ; P2.4@3657.23,2297.23 ccw(c3698.83,2338.83) 3698.83,2280 ; P2.4@3657.23,2297.23 ccw(c3698.83,2338.83) 3698.83,2280 ; P2.4@3664.3,2255.7 cw(c3722.98,2197.02) 3722.98,2280 ; P2.4@3664.3,2255.7 cw(c3722.98,2197.02) 3722.98,2280 ; P2.4@3664.3,2255.7 cw(c3722.98,2197.02) 3722.98,2280 ; P2.4@3664.3,2255.7 cw(c3722.98,2197.02) 3722.98,2280 ; P2.4@3664.3,2255.7 cw(c3722.98,2197.02) 3722.98,2280 ; P2.4@3664.3,2304.3 ccw(c3722.98,2362.98) 3722.98,2280 ; P2.4@3664.3,2304.3 ccw(c3722.98,2362.98) 3722.98,2280 ; P2.4@3664.3,2304.3 ccw(c3722.98,2362.98) 3722.98,2280 ; P2.4@3664.3,2304.3 ccw(c3722.98,2362.98) 3722.98,2280 ; P2.4@3664.3,2304.3 ccw(c3722.98,2362.98) 3722.98,2280 ; R13.2@4218.54,2621.04 cw(c4196.84,2599.33) 4227.54,2599.33 ; R13.2@4218.54,2621.04 cw(c4196.84,2599.33) 4227.54,2599.33 ; R13.2@4218.54,2621.04 cw(c4196.84,2599.33) 4227.54,2599.33 ; R13.2@4218.54,2621.04 cw(c4196.84,2599.33) 4227.54,2599.33 ; R13.2@4218.54,2621.04 cw(c4196.84,2599.33) 4227.54,2599.33 ; 4227.54,2599.33 cw(c4258.24,2599.33) R13.2@4236.53,2621.04 ; 4227.54,2599.33 cw(c4258.24,2599.33) R13.2@4236.53,2621.04 ; 4227.54,2599.33 cw(c4258.24,2599.33) R13.2@4236.53,2621.04 ; 4227.54,2599.33 cw(c4258.24,2599.33) R13.2@4236.53,2621.04 ; 4227.54,2599.33 cw(c4258.24,2599.33) R13.2@4236.53,2621.04
CH_A: P3.2 P4.2 U3.6 | length 5748.4
  Bottom Layer w20: U3.6@4827.22,3335.81 4869.19,3335.81 4925,3280 ; P3.2@4956,2632 5090,2766 5090,2978 4925,3143 4925,3280 ; U3.6@4858.71,3334 cw(c4858.71,3304.35) 4879.68,3325.32 ; U3.6@4858.71,3334 cw(c4858.71,3304.35) 4879.68,3325.32 ; U3.6@4858.71,3334 cw(c4858.71,3304.35) 4879.68,3325.32 ; U3.6@4858.71,3334 cw(c4858.71,3304.35) 4879.68,3325.32 ; U3.6@4858.71,3334 cw(c4858.71,3304.35) 4879.68,3325.32 ; 4925,3196.05 ccw(c5024.17,3196.05) P4.2@4961.7,3119.03 ; 4925,3196.05 ccw(c5024.17,3196.05) P4.2@4961.7,3119.03 ; 4925,3196.05 ccw(c5024.17,3196.05) P4.2@4961.7,3119.03 ; 4925,3196.05 ccw(c5024.17,3196.05) P4.2@4961.7,3119.03 ; 4925,3196.05 ccw(c5024.17,3196.05) P4.2@4961.7,3119.03 ; 4925,3238.02 ccw(c5058.2,3238.02) P4.2@4974.3,3134.57 ; 4925,3238.02 ccw(c5058.2,3238.02) P4.2@4974.3,3134.57 ; 4925,3238.02 ccw(c5058.2,3238.02) P4.2@4974.3,3134.57 ; 4925,3238.02 ccw(c5058.2,3238.02) P4.2@4974.3,3134.57 ; 4925,3238.02 ccw(c5058.2,3238.02) P4.2@4974.3,3134.57 ; 4925,3279.99 ccw(c5092.24,3279.99) P4.2@4986.9,3150.1 ; 4925,3279.99 ccw(c5092.24,3279.99) P4.2@4986.9,3150.1 ; 4925,3279.99 ccw(c5092.24,3279.99) P4.2@4986.9,3150.1 ; 4925,3279.99 ccw(c5092.24,3279.99) P4.2@4986.9,3150.1 ; 4925,3279.99 ccw(c5092.24,3279.99) P4.2@4986.9,3150.1 ; P3.2@4956,2661.06 ccw(c4956,2731.2) 5005.6,2681.6 ; P3.2@4956,2661.06 ccw(c4956,2731.2) 5005.6,2681.6 ; P3.2@4956,2661.06 ccw(c4956,2731.2) 5005.6,2681.6 ; P3.2@4956,2661.06 ccw(c4956,2731.2) 5005.6,2681.6 ; P3.2@4956,2661.06 ccw(c4956,2731.2) 5005.6,2681.6 ; P3.2@4956,2681.06 ccw(c4956,2799.48) 5039.74,2715.74 ; P3.2@4956,2681.06 ccw(c4956,2799.48) 5039.74,2715.74 ; P3.2@4956,2681.06 ccw(c4956,2799.48) 5039.74,2715.74 ; P3.2@4956,2681.06 ccw(c4956,2799.48) 5039.74,2715.74 ; P3.2@4956,2681.06 ccw(c4956,2799.48) 5039.74,2715.74 ; P4.2@4956,3062.94 cw(c4956,2944.52) 5039.74,3028.26 ; P4.2@4956,3062.94 cw(c4956,2944.52) 5039.74,3028.26 ; P4.2@4956,3062.94 cw(c4956,2944.52) 5039.74,3028.26 ; P4.2@4956,3062.94 cw(c4956,2944.52) 5039.74,3028.26 ; P4.2@4956,3062.94 cw(c4956,2944.52) 5039.74,3028.26 ; P4.2@4956,3082.94 cw(c4956,3012.8) 5005.6,3062.4 ; P4.2@4956,3082.94 cw(c4956,3012.8) 5005.6,3062.4 ; P4.2@4956,3082.94 cw(c4956,3012.8) 5005.6,3062.4 ; P4.2@4956,3082.94 cw(c4956,3012.8) 5005.6,3062.4 ; P4.2@4956,3082.94 cw(c4956,3012.8) 5005.6,3062.4 ; P3.2@4985.06,2632 cw(c5055.2,2632) 5005.6,2681.6 ; P3.2@4985.06,2632 cw(c5055.2,2632) 5005.6,2681.6 ; P3.2@4985.06,2632 cw(c5055.2,2632) 5005.6,2681.6 ; P3.2@4985.06,2632 cw(c5055.2,2632) 5005.6,2681.6 ; P3.2@4985.06,2632 cw(c5055.2,2632) 5005.6,2681.6 ; P4.2@4985.06,3112 ccw(c5055.2,3112) 5005.6,3062.4 ; P4.2@4985.06,3112 ccw(c5055.2,3112) 5005.6,3062.4 ; P4.2@4985.06,3112 ccw(c5055.2,3112) 5005.6,3062.4 ; P4.2@4985.06,3112 ccw(c5055.2,3112) 5005.6,3062.4 ; P4.2@4985.06,3112 ccw(c5055.2,3112) 5005.6,3062.4 ; P3.2@5005.06,2632 cw(c5123.48,2632) 5039.74,2715.74 ; P3.2@5005.06,2632 cw(c5123.48,2632) 5039.74,2715.74 ; P3.2@5005.06,2632 cw(c5123.48,2632) 5039.74,2715.74 ; P3.2@5005.06,2632 cw(c5123.48,2632) 5039.74,2715.74 ; P3.2@5005.06,2632 cw(c5123.48,2632) 5039.74,2715.74 ; P4.2@5005.06,3112 ccw(c5123.48,3112) 5039.74,3028.26 ; P4.2@5005.06,3112 ccw(c5123.48,3112) 5039.74,3028.26 ; P4.2@5005.06,3112 ccw(c5123.48,3112) 5039.74,3028.26 ; P4.2@5005.06,3112 ccw(c5123.48,3112) 5039.74,3028.26 ; P4.2@5005.06,3112 ccw(c5123.48,3112) 5039.74,3028.26
CH_B: P3.1 P4.1 U3.7 | length 3215.6
  Bottom Layer w20: U3.7@4827.22,3385.81 4765.81,3385.81 4730,3350 4730,3095 4855,2970 4855,2536.05 P3.1@4956,2435.05 ; P4.1@4956,2915.05 4869.95,2915.05 ; 4869.96,2915.05 cw(c4869.96,2864.11) P4.1@4913.79,2890.06 ; 4869.96,2915.05 ccw(c4869.96,2965.98) P4.1@4913.79,2940.04 ; 4869.96,2915.05 cw(c4869.96,2864.11) P4.1@4913.79,2890.06 ; 4869.96,2915.05 ccw(c4869.96,2965.98) P4.1@4913.79,2940.04 ; 4869.96,2915.05 ccw(c4869.96,2965.98) P4.1@4913.79,2940.04 ; 4869.96,2915.05 cw(c4869.96,2864.11) P4.1@4913.79,2890.06 ; 4869.96,2915.05 ccw(c4869.96,2965.98) P4.1@4913.79,2940.04 ; 4869.96,2915.05 cw(c4869.96,2864.11) P4.1@4913.79,2890.06 ; 4869.96,2915.05 ccw(c4869.96,2965.98) P4.1@4913.79,2940.04 ; 4869.96,2915.05 cw(c4869.96,2864.11) P4.1@4913.79,2890.06 ; 4872.26,2518.79 cw(c4788.52,2435.05) P3.1@4906.94,2435.05 ; 4872.26,2518.79 ccw(c4956,2602.53) P3.1@4956,2484.1 ; 4872.26,2518.79 cw(c4788.52,2435.05) P3.1@4906.94,2435.05 ; 4872.26,2518.79 ccw(c4956,2602.53) P3.1@4956,2484.1 ; 4872.26,2518.79 ccw(c4956,2602.53) P3.1@4956,2484.1 ; 4872.26,2518.79 cw(c4788.52,2435.05) P3.1@4906.94,2435.05 ; 4872.26,2518.79 ccw(c4956,2602.53) P3.1@4956,2484.1 ; 4872.26,2518.79 cw(c4788.52,2435.05) P3.1@4906.94,2435.05 ; 4872.26,2518.79 ccw(c4956,2602.53) P3.1@4956,2484.1 ; 4872.26,2518.79 cw(c4788.52,2435.05) P3.1@4906.94,2435.05 ; 4906.4,2484.65 cw(c4856.8,2435.05) P3.1@4926.94,2435.05 ; 4906.4,2484.65 ccw(c4956,2534.25) P3.1@4956,2464.1 ; 4906.4,2484.65 cw(c4856.8,2435.05) P3.1@4926.94,2435.05 ; 4906.4,2484.65 ccw(c4956,2534.25) P3.1@4956,2464.1 ; 4906.4,2484.65 ccw(c4956,2534.25) P3.1@4956,2464.1 ; 4906.4,2484.65 cw(c4856.8,2435.05) P3.1@4926.94,2435.05 ; 4906.4,2484.65 ccw(c4956,2534.25) P3.1@4956,2464.1 ; 4906.4,2484.65 cw(c4856.8,2435.05) P3.1@4926.94,2435.05 ; 4906.4,2484.65 ccw(c4956,2534.25) P3.1@4956,2464.1 ; 4906.4,2484.65 cw(c4856.8,2435.05) P3.1@4926.94,2435.05
DIPSW1: P1.21 R7.2 S4.5 | length 3699.1
  Top Layer w10: S4.5@3950,3870 4005,3925 4442,3925 P1.21@4568,4051 ; S4.5@3950,3888.46 ccw(c3950,3933.04) 3981.52,3901.52 ; S4.5@3950,3888.46 ccw(c3950,3933.04) 3981.52,3901.52 ; S4.5@3950,3888.46 ccw(c3950,3933.04) 3981.52,3901.52 ; S4.5@3950,3888.46 ccw(c3950,3933.04) 3981.52,3901.52 ; S4.5@3950,3888.46 ccw(c3950,3933.04) 3981.52,3901.52 ; S4.5@3950,3898.46 ccw(c3950,3967.18) 3998.59,3918.59 ; S4.5@3950,3898.46 ccw(c3950,3967.18) 3998.59,3918.59 ; S4.5@3950,3898.46 ccw(c3950,3967.18) 3998.59,3918.59 ; S4.5@3950,3898.46 ccw(c3950,3967.18) 3998.59,3918.59 ; S4.5@3950,3898.46 ccw(c3950,3967.18) 3998.59,3918.59 ; S4.5@3968.46,3870 cw(c4013.04,3870) 3981.52,3901.52 ; S4.5@3968.46,3870 cw(c4013.04,3870) 3981.52,3901.52 ; S4.5@3968.46,3870 cw(c4013.04,3870) 3981.52,3901.52 ; S4.5@3968.46,3870 cw(c4013.04,3870) 3981.52,3901.52 ; S4.5@3968.46,3870 cw(c4013.04,3870) 3981.52,3901.52 ; S4.5@3978.46,3870 cw(c4047.18,3870) 3998.59,3918.59 ; S4.5@3978.46,3870 cw(c4047.18,3870) 3998.59,3918.59 ; S4.5@3978.46,3870 cw(c4047.18,3870) 3998.59,3918.59 ; S4.5@3978.46,3870 cw(c4047.18,3870) 3998.59,3918.59 ; S4.5@3978.46,3870 cw(c4047.18,3870) 3998.59,3918.59 ; 4519.41,4002.41 cw(c4568,3953.82) P1.21@4568,4022.54 ; 4519.41,4002.41 ccw(c4470.82,4051) P1.21@4539.54,4051 ; 4519.41,4002.41 cw(c4568,3953.82) P1.21@4568,4022.54 ; 4519.41,4002.41 ccw(c4470.82,4051) P1.21@4539.54,4051 ; 4519.41,4002.41 ccw(c4470.82,4051) P1.21@4539.54,4051 ; 4519.41,4002.41 cw(c4568,3953.82) P1.21@4568,4022.54 ; 4519.41,4002.41 ccw(c4470.82,4051) P1.21@4539.54,4051 ; 4519.41,4002.41 cw(c4568,3953.82) P1.21@4568,4022.54 ; 4519.41,4002.41 ccw(c4470.82,4051) P1.21@4539.54,4051 ; 4519.41,4002.41 cw(c4568,3953.82) P1.21@4568,4022.54 ; 4536.48,4019.48 cw(c4568,3987.96) P1.21@4568,4032.54 ; 4536.48,4019.48 ccw(c4504.96,4051) P1.21@4549.54,4051 ; 4536.48,4019.48 cw(c4568,3987.96) P1.21@4568,4032.54 ; 4536.48,4019.48 ccw(c4504.96,4051) P1.21@4549.54,4051 ; 4536.48,4019.48 ccw(c4504.96,4051) P1.21@4549.54,4051 ; 4536.48,4019.48 cw(c4568,3987.96) P1.21@4568,4032.54 ; 4536.48,4019.48 ccw(c4504.96,4051) P1.21@4549.54,4051 ; 4536.48,4019.48 cw(c4568,3987.96) P1.21@4568,4032.54 ; 4536.48,4019.48 ccw(c4504.96,4051) P1.21@4549.54,4051 ; 4536.48,4019.48 cw(c4568,3987.96) P1.21@4568,4032.54
  Bottom Layer w10: R7.2@3950,3774.46 S4.5@3950,3870 ; S4.5@3929.87,3849.87 cw(c3881.28,3801.28) 3950,3801.28 ; S4.5@3929.87,3849.87 cw(c3881.28,3801.28) 3950,3801.28 ; S4.5@3929.87,3849.87 cw(c3881.28,3801.28) 3950,3801.28 ; S4.5@3929.87,3849.87 cw(c3881.28,3801.28) 3950,3801.28 ; S4.5@3929.87,3849.87 cw(c3881.28,3801.28) 3950,3801.28 ; S4.5@3936.94,3856.94 cw(c3905.42,3825.42) 3950,3825.42 ; S4.5@3936.94,3856.94 cw(c3905.42,3825.42) 3950,3825.42 ; S4.5@3936.94,3856.94 cw(c3905.42,3825.42) 3950,3825.42 ; S4.5@3936.94,3856.94 cw(c3905.42,3825.42) 3950,3825.42 ; S4.5@3936.94,3856.94 cw(c3905.42,3825.42) 3950,3825.42 ; R7.2@3941.04,3781.46 ccw(c3919.41,3803.09) 3950,3803.09 ; R7.2@3941.04,3781.46 ccw(c3919.41,3803.09) 3950,3803.09 ; R7.2@3941.04,3781.46 ccw(c3919.41,3803.09) 3950,3803.09 ; R7.2@3941.04,3781.46 ccw(c3919.41,3803.09) 3950,3803.09 ; R7.2@3941.04,3781.46 ccw(c3919.41,3803.09) 3950,3803.09 ; 3950,3801.28 cw(c4018.72,3801.28) S4.5@3970.13,3849.87 ; 3950,3801.28 cw(c4018.72,3801.28) S4.5@3970.13,3849.87 ; 3950,3801.28 cw(c4018.72,3801.28) S4.5@3970.13,3849.87 ; 3950,3801.28 cw(c4018.72,3801.28) S4.5@3970.13,3849.87 ; 3950,3801.28 cw(c4018.72,3801.28) S4.5@3970.13,3849.87 ; 3950,3803.24 ccw(c3980.81,3803.24) R7.2@3959.02,3781.46 ; 3950,3803.24 ccw(c3980.81,3803.24) R7.2@3959.02,3781.46 ; 3950,3803.24 ccw(c3980.81,3803.24) R7.2@3959.02,3781.46 ; 3950,3803.24 ccw(c3980.81,3803.24) R7.2@3959.02,3781.46 ; 3950,3803.24 ccw(c3980.81,3803.24) R7.2@3959.02,3781.46 ; 3950,3825.42 cw(c3994.58,3825.42) S4.5@3963.06,3856.94 ; 3950,3825.42 cw(c3994.58,3825.42) S4.5@3963.06,3856.94 ; 3950,3825.42 cw(c3994.58,3825.42) S4.5@3963.06,3856.94 ; 3950,3825.42 cw(c3994.58,3825.42) S4.5@3963.06,3856.94 ; 3950,3825.42 cw(c3994.58,3825.42) S4.5@3963.06,3856.94
DIPSW2: P1.22 R6.2 S4.6 | length 3699.1
  Top Layer w10: S4.6@3850,3870 3925,3945 4362,3945 P1.22@4468,4051 ; S4.6@3850,3888.46 ccw(c3850,3933.04) 3881.52,3901.52 ; S4.6@3850,3888.46 ccw(c3850,3933.04) 3881.52,3901.52 ; S4.6@3850,3888.46 ccw(c3850,3933.04) 3881.52,3901.52 ; S4.6@3850,3888.46 ccw(c3850,3933.04) 3881.52,3901.52 ; S4.6@3850,3888.46 ccw(c3850,3933.04) 3881.52,3901.52 ; S4.6@3850,3898.46 ccw(c3850,3967.18) 3898.59,3918.59 ; S4.6@3850,3898.46 ccw(c3850,3967.18) 3898.59,3918.59 ; S4.6@3850,3898.46 ccw(c3850,3967.18) 3898.59,3918.59 ; S4.6@3850,3898.46 ccw(c3850,3967.18) 3898.59,3918.59 ; S4.6@3850,3898.46 ccw(c3850,3967.18) 3898.59,3918.59 ; S4.6@3868.46,3870 cw(c3913.04,3870) 3881.52,3901.52 ; S4.6@3868.46,3870 cw(c3913.04,3870) 3881.52,3901.52 ; S4.6@3868.46,3870 cw(c3913.04,3870) 3881.52,3901.52 ; S4.6@3868.46,3870 cw(c3913.04,3870) 3881.52,3901.52 ; S4.6@3868.46,3870 cw(c3913.04,3870) 3881.52,3901.52 ; S4.6@3878.46,3870 cw(c3947.18,3870) 3898.59,3918.59 ; S4.6@3878.46,3870 cw(c3947.18,3870) 3898.59,3918.59 ; S4.6@3878.46,3870 cw(c3947.18,3870) 3898.59,3918.59 ; S4.6@3878.46,3870 cw(c3947.18,3870) 3898.59,3918.59 ; S4.6@3878.46,3870 cw(c3947.18,3870) 3898.59,3918.59 ; 4419.41,4002.41 cw(c4468,3953.82) P1.22@4468,4022.54 ; 4419.41,4002.41 ccw(c4370.82,4051) P1.22@4439.54,4051 ; 4419.41,4002.41 cw(c4468,3953.82) P1.22@4468,4022.54 ; 4419.41,4002.41 ccw(c4370.82,4051) P1.22@4439.54,4051 ; 4419.41,4002.41 ccw(c4370.82,4051) P1.22@4439.54,4051 ; 4419.41,4002.41 cw(c4468,3953.82) P1.22@4468,4022.54 ; 4419.41,4002.41 ccw(c4370.82,4051) P1.22@4439.54,4051 ; 4419.41,4002.41 cw(c4468,3953.82) P1.22@4468,4022.54 ; 4419.41,4002.41 ccw(c4370.82,4051) P1.22@4439.54,4051 ; 4419.41,4002.41 cw(c4468,3953.82) P1.22@4468,4022.54 ; 4436.48,4019.48 cw(c4468,3987.96) P1.22@4468,4032.54 ; 4436.48,4019.48 ccw(c4404.96,4051) P1.22@4449.54,4051 ; 4436.48,4019.48 cw(c4468,3987.96) P1.22@4468,4032.54 ; 4436.48,4019.48 ccw(c4404.96,4051) P1.22@4449.54,4051 ; 4436.48,4019.48 ccw(c4404.96,4051) P1.22@4449.54,4051 ; 4436.48,4019.48 cw(c4468,3987.96) P1.22@4468,4032.54 ; 4436.48,4019.48 ccw(c4404.96,4051) P1.22@4449.54,4051 ; 4436.48,4019.48 cw(c4468,3987.96) P1.22@4468,4032.54 ; 4436.48,4019.48 ccw(c4404.96,4051) P1.22@4449.54,4051 ; 4436.48,4019.48 cw(c4468,3987.96) P1.22@4468,4032.54
  Bottom Layer w10: R6.2@3850,3774.46 S4.6@3850,3870 ; S4.6@3829.87,3849.87 cw(c3781.28,3801.28) 3850,3801.28 ; S4.6@3829.87,3849.87 cw(c3781.28,3801.28) 3850,3801.28 ; S4.6@3829.87,3849.87 cw(c3781.28,3801.28) 3850,3801.28 ; S4.6@3829.87,3849.87 cw(c3781.28,3801.28) 3850,3801.28 ; S4.6@3829.87,3849.87 cw(c3781.28,3801.28) 3850,3801.28 ; S4.6@3836.94,3856.94 cw(c3805.42,3825.42) 3850,3825.42 ; S4.6@3836.94,3856.94 cw(c3805.42,3825.42) 3850,3825.42 ; S4.6@3836.94,3856.94 cw(c3805.42,3825.42) 3850,3825.42 ; S4.6@3836.94,3856.94 cw(c3805.42,3825.42) 3850,3825.42 ; S4.6@3836.94,3856.94 cw(c3805.42,3825.42) 3850,3825.42 ; R6.2@3841.04,3781.46 ccw(c3819.41,3803.09) 3850,3803.09 ; R6.2@3841.04,3781.46 ccw(c3819.41,3803.09) 3850,3803.09 ; R6.2@3841.04,3781.46 ccw(c3819.41,3803.09) 3850,3803.09 ; R6.2@3841.04,3781.46 ccw(c3819.41,3803.09) 3850,3803.09 ; R6.2@3841.04,3781.46 ccw(c3819.41,3803.09) 3850,3803.09 ; 3850,3801.28 cw(c3918.72,3801.28) S4.6@3870.13,3849.87 ; 3850,3801.28 cw(c3918.72,3801.28) S4.6@3870.13,3849.87 ; 3850,3801.28 cw(c3918.72,3801.28) S4.6@3870.13,3849.87 ; 3850,3801.28 cw(c3918.72,3801.28) S4.6@3870.13,3849.87 ; 3850,3801.28 cw(c3918.72,3801.28) S4.6@3870.13,3849.87 ; 3850,3803.24 ccw(c3880.81,3803.24) R6.2@3859.02,3781.46 ; 3850,3803.24 ccw(c3880.81,3803.24) R6.2@3859.02,3781.46 ; 3850,3803.24 ccw(c3880.81,3803.24) R6.2@3859.02,3781.46 ; 3850,3803.24 ccw(c3880.81,3803.24) R6.2@3859.02,3781.46 ; 3850,3803.24 ccw(c3880.81,3803.24) R6.2@3859.02,3781.46 ; 3850,3825.42 cw(c3894.58,3825.42) S4.6@3863.06,3856.94 ; 3850,3825.42 cw(c3894.58,3825.42) S4.6@3863.06,3856.94 ; 3850,3825.42 cw(c3894.58,3825.42) S4.6@3863.06,3856.94 ; 3850,3825.42 cw(c3894.58,3825.42) S4.6@3863.06,3856.94 ; 3850,3825.42 cw(c3894.58,3825.42) S4.6@3863.06,3856.94
DIPSW3: P1.23 R5.2 S4.7 | length 3633.1
  Top Layer w10: S4.7@3750,3870 3845,3965 4222,3965 P1.23@4308,4051 ; S4.7@3750,3888.46 ccw(c3750,3933.04) 3781.52,3901.52 ; S4.7@3750,3888.46 ccw(c3750,3933.04) 3781.52,3901.52 ; S4.7@3750,3888.46 ccw(c3750,3933.04) 3781.52,3901.52 ; S4.7@3750,3888.46 ccw(c3750,3933.04) 3781.52,3901.52 ; S4.7@3750,3888.46 ccw(c3750,3933.04) 3781.52,3901.52 ; S4.7@3750,3898.46 ccw(c3750,3967.18) 3798.59,3918.59 ; S4.7@3750,3898.46 ccw(c3750,3967.18) 3798.59,3918.59 ; S4.7@3750,3898.46 ccw(c3750,3967.18) 3798.59,3918.59 ; S4.7@3750,3898.46 ccw(c3750,3967.18) 3798.59,3918.59 ; S4.7@3750,3898.46 ccw(c3750,3967.18) 3798.59,3918.59 ; S4.7@3768.46,3870 cw(c3813.04,3870) 3781.52,3901.52 ; S4.7@3768.46,3870 cw(c3813.04,3870) 3781.52,3901.52 ; S4.7@3768.46,3870 cw(c3813.04,3870) 3781.52,3901.52 ; S4.7@3768.46,3870 cw(c3813.04,3870) 3781.52,3901.52 ; S4.7@3768.46,3870 cw(c3813.04,3870) 3781.52,3901.52 ; S4.7@3778.46,3870 cw(c3847.18,3870) 3798.59,3918.59 ; S4.7@3778.46,3870 cw(c3847.18,3870) 3798.59,3918.59 ; S4.7@3778.46,3870 cw(c3847.18,3870) 3798.59,3918.59 ; S4.7@3778.46,3870 cw(c3847.18,3870) 3798.59,3918.59 ; S4.7@3778.46,3870 cw(c3847.18,3870) 3798.59,3918.59 ; 4259.41,4002.41 cw(c4308,3953.82) P1.23@4308,4022.54 ; 4259.41,4002.41 ccw(c4210.82,4051) P1.23@4279.54,4051 ; 4259.41,4002.41 cw(c4308,3953.82) P1.23@4308,4022.54 ; 4259.41,4002.41 ccw(c4210.82,4051) P1.23@4279.54,4051 ; 4259.41,4002.41 ccw(c4210.82,4051) P1.23@4279.54,4051 ; 4259.41,4002.41 cw(c4308,3953.82) P1.23@4308,4022.54 ; 4259.41,4002.41 ccw(c4210.82,4051) P1.23@4279.54,4051 ; 4259.41,4002.41 cw(c4308,3953.82) P1.23@4308,4022.54 ; 4259.41,4002.41 ccw(c4210.82,4051) P1.23@4279.54,4051 ; 4259.41,4002.41 cw(c4308,3953.82) P1.23@4308,4022.54 ; P1.23@4276.48,4019.48 cw(c4308,3987.96) P1.23@4308,4032.54 ; P1.23@4276.48,4019.48 ccw(c4244.96,4051) P1.23@4289.54,4051 ; P1.23@4276.48,4019.48 cw(c4308,3987.96) P1.23@4308,4032.54 ; P1.23@4276.48,4019.48 ccw(c4244.96,4051) P1.23@4289.54,4051 ; P1.23@4276.48,4019.48 ccw(c4244.96,4051) P1.23@4289.54,4051 ; P1.23@4276.48,4019.48 cw(c4308,3987.96) P1.23@4308,4032.54 ; P1.23@4276.48,4019.48 ccw(c4244.96,4051) P1.23@4289.54,4051 ; P1.23@4276.48,4019.48 cw(c4308,3987.96) P1.23@4308,4032.54 ; P1.23@4276.48,4019.48 ccw(c4244.96,4051) P1.23@4289.54,4051 ; P1.23@4276.48,4019.48 cw(c4308,3987.96) P1.23@4308,4032.54
  Bottom Layer w10: R5.2@3750,3780.46 S4.7@3750,3870 ; S4.7@3729.87,3849.87 cw(c3681.28,3801.28) 3750,3801.28 ; S4.7@3729.87,3849.87 cw(c3681.28,3801.28) 3750,3801.28 ; S4.7@3729.87,3849.87 cw(c3681.28,3801.28) 3750,3801.28 ; S4.7@3729.87,3849.87 cw(c3681.28,3801.28) 3750,3801.28 ; S4.7@3729.87,3849.87 cw(c3681.28,3801.28) 3750,3801.28 ; S4.7@3736.94,3856.94 cw(c3705.42,3825.42) 3750,3825.42 ; S4.7@3736.94,3856.94 cw(c3705.42,3825.42) 3750,3825.42 ; S4.7@3736.94,3856.94 cw(c3705.42,3825.42) 3750,3825.42 ; S4.7@3736.94,3856.94 cw(c3705.42,3825.42) 3750,3825.42 ; S4.7@3736.94,3856.94 cw(c3705.42,3825.42) 3750,3825.42 ; R5.2@3739.98,3781.46 ccw(c3715.78,3805.65) 3750,3805.65 ; R5.2@3739.98,3781.46 ccw(c3715.78,3805.65) 3750,3805.65 ; R5.2@3739.98,3781.46 ccw(c3715.78,3805.65) 3750,3805.65 ; R5.2@3739.98,3781.46 ccw(c3715.78,3805.65) 3750,3805.65 ; R5.2@3739.98,3781.46 ccw(c3715.78,3805.65) 3750,3805.65 ; 3750,3800.67 ccw(c3777.18,3800.67) R5.2@3757.96,3781.46 ; 3750,3800.67 ccw(c3777.18,3800.67) R5.2@3757.96,3781.46 ; 3750,3800.67 ccw(c3777.18,3800.67) R5.2@3757.96,3781.46 ; 3750,3800.67 ccw(c3777.18,3800.67) R5.2@3757.96,3781.46 ; 3750,3800.67 ccw(c3777.18,3800.67) R5.2@3757.96,3781.46 ; 3750,3801.28 cw(c3818.72,3801.28) S4.7@3770.13,3849.87 ; 3750,3801.28 cw(c3818.72,3801.28) S4.7@3770.13,3849.87 ; 3750,3801.28 cw(c3818.72,3801.28) S4.7@3770.13,3849.87 ; 3750,3801.28 cw(c3818.72,3801.28) S4.7@3770.13,3849.87 ; 3750,3801.28 cw(c3818.72,3801.28) S4.7@3770.13,3849.87 ; 3750,3825.42 cw(c3794.58,3825.42) S4.7@3763.06,3856.94 ; 3750,3825.42 cw(c3794.58,3825.42) S4.7@3763.06,3856.94 ; 3750,3825.42 cw(c3794.58,3825.42) S4.7@3763.06,3856.94 ; 3750,3825.42 cw(c3794.58,3825.42) S4.7@3763.06,3856.94 ; 3750,3825.42 cw(c3794.58,3825.42) S4.7@3763.06,3856.94